# Altium PCB PCB1_BUS_DATN.PcbDoc
Units mil, origin at the board's own origin, x right, y up, seen from the top; angles counter-clockwise.
Board outline 2985 x 2850 mil, 2 copper layers (Top Layer, Bottom Layer); 14 components, 31 nets, 90 pads, 2 vias.
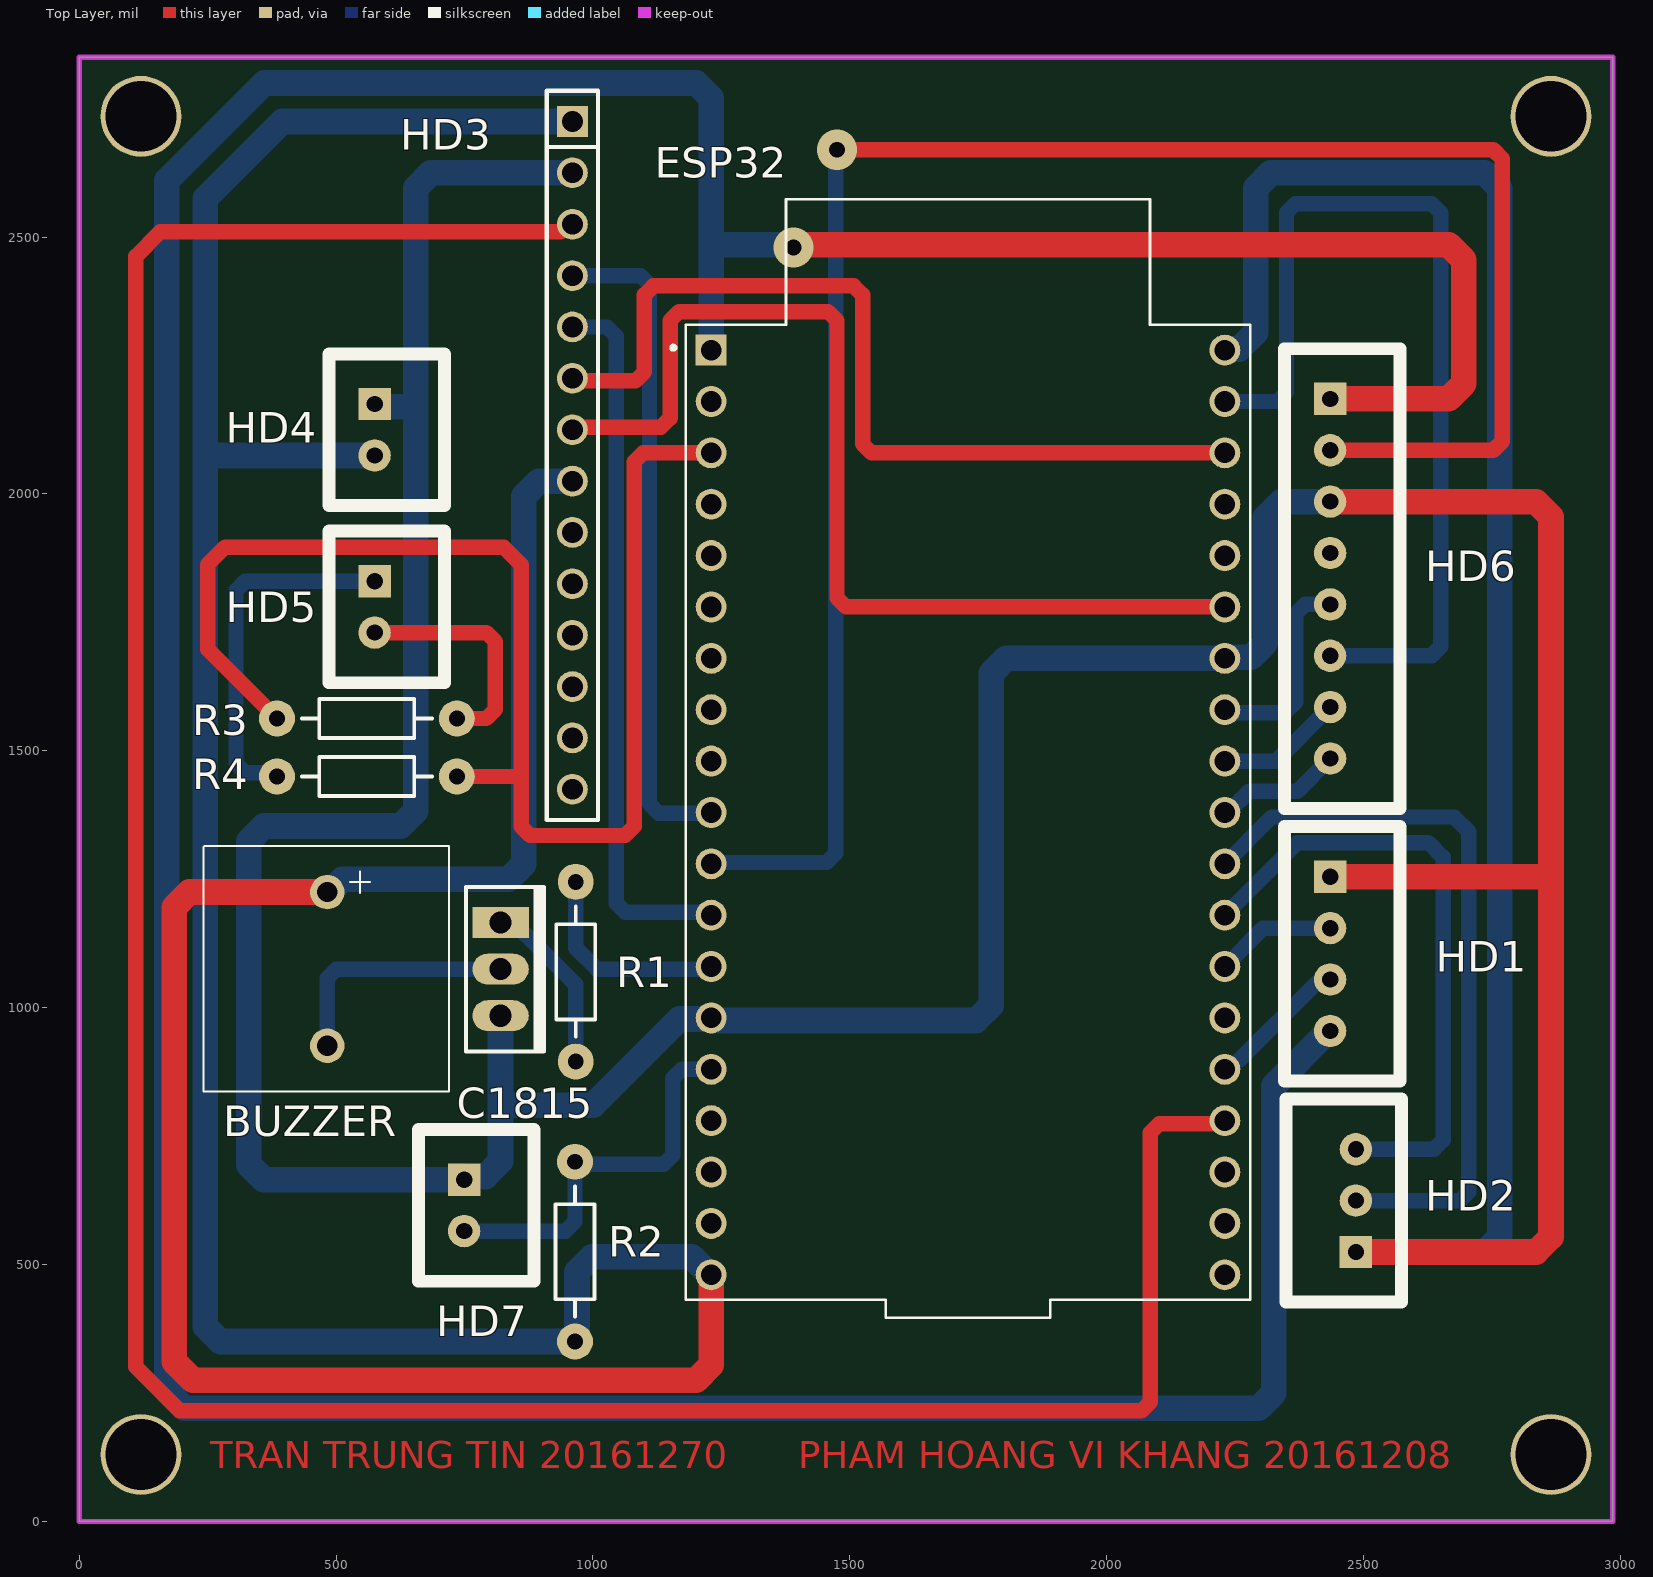
[diagram p0: Top Layer view]
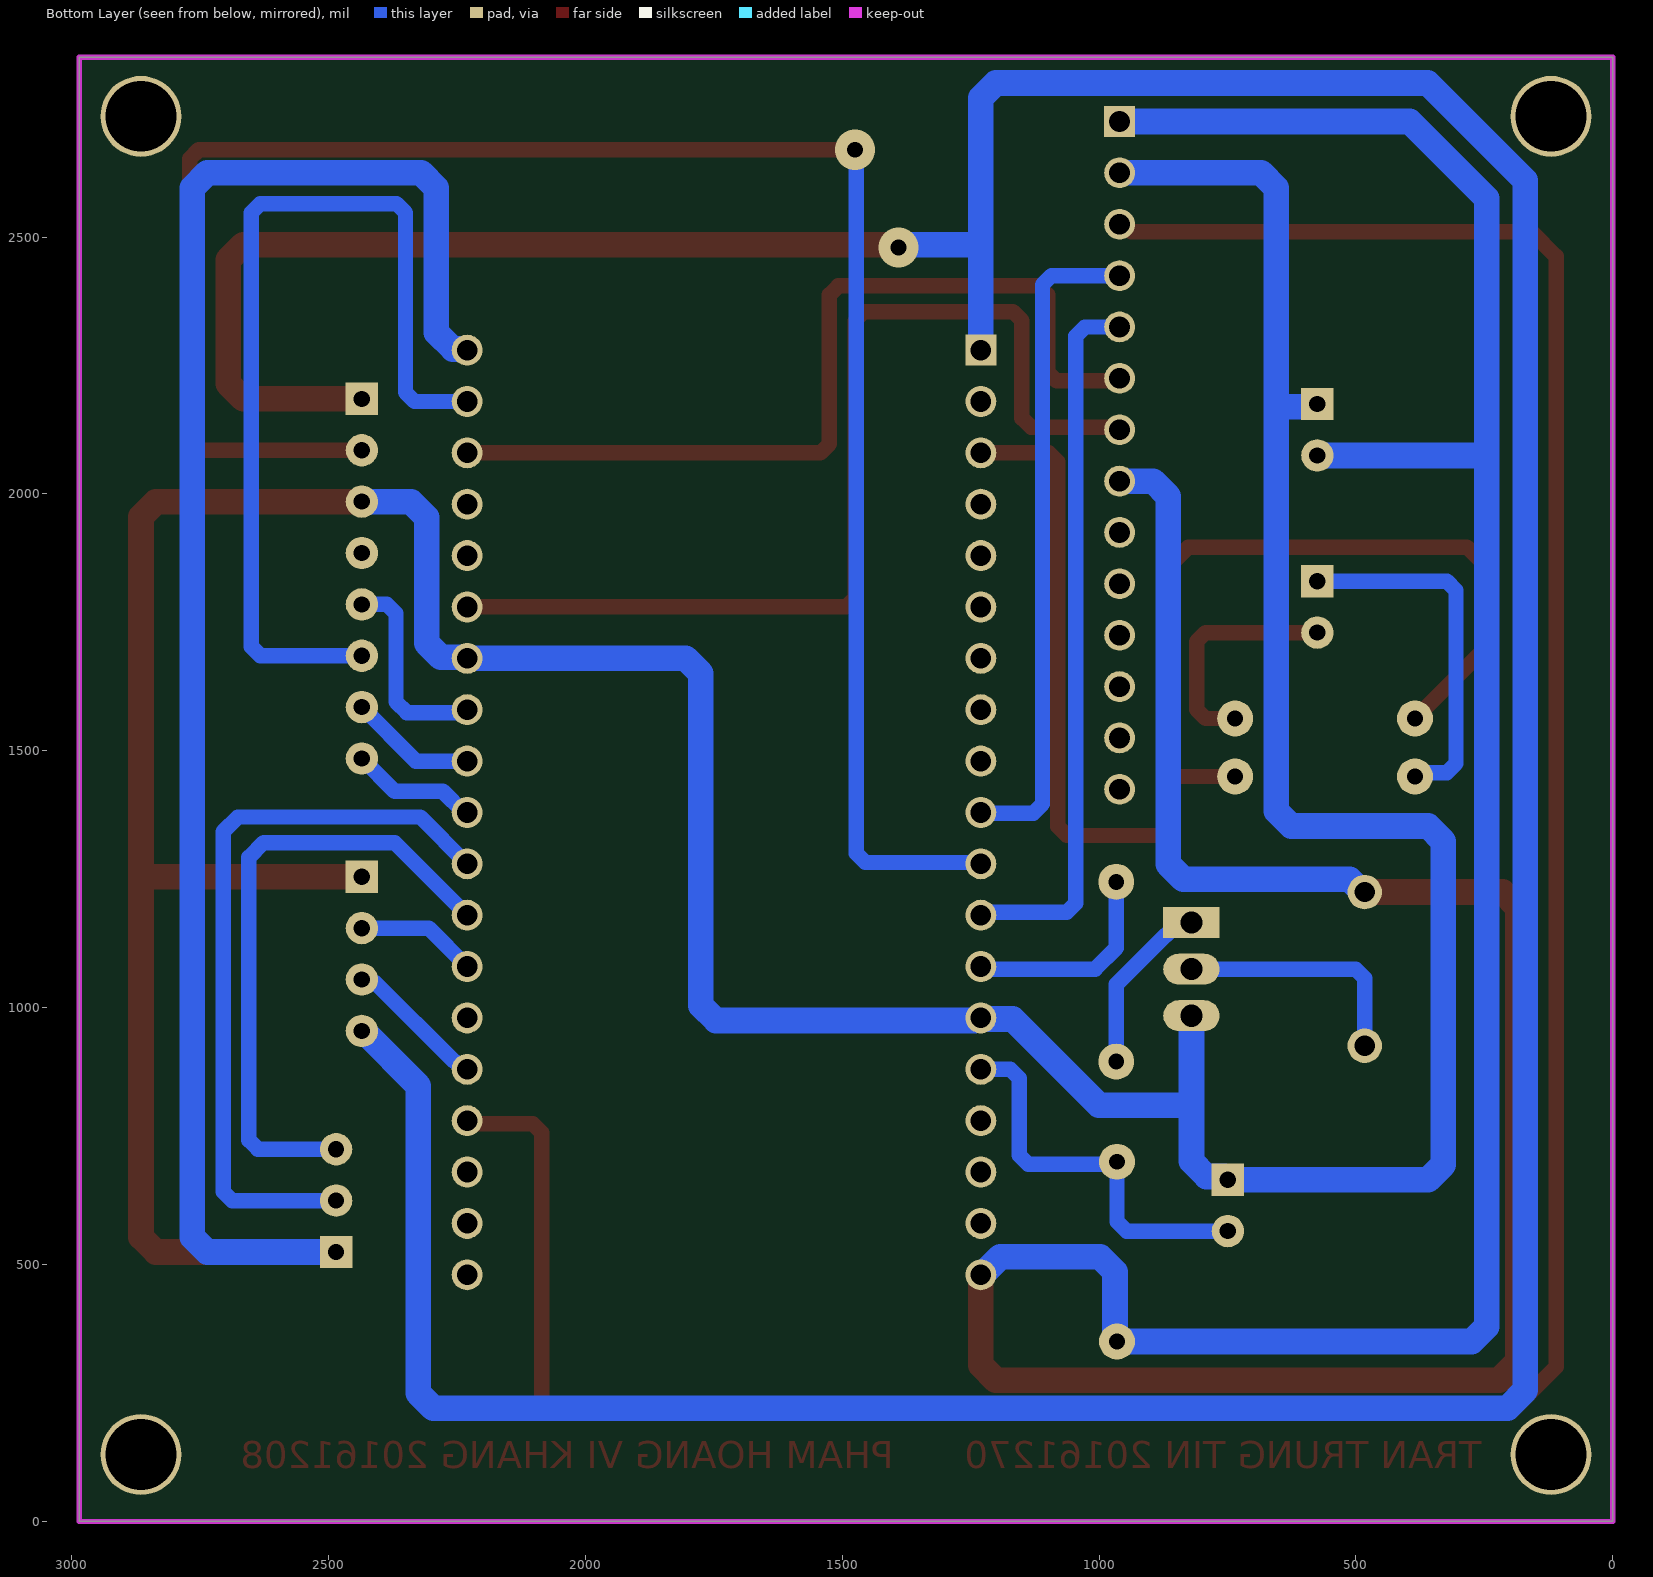
[diagram p1: Bottom Layer view, seen from below]
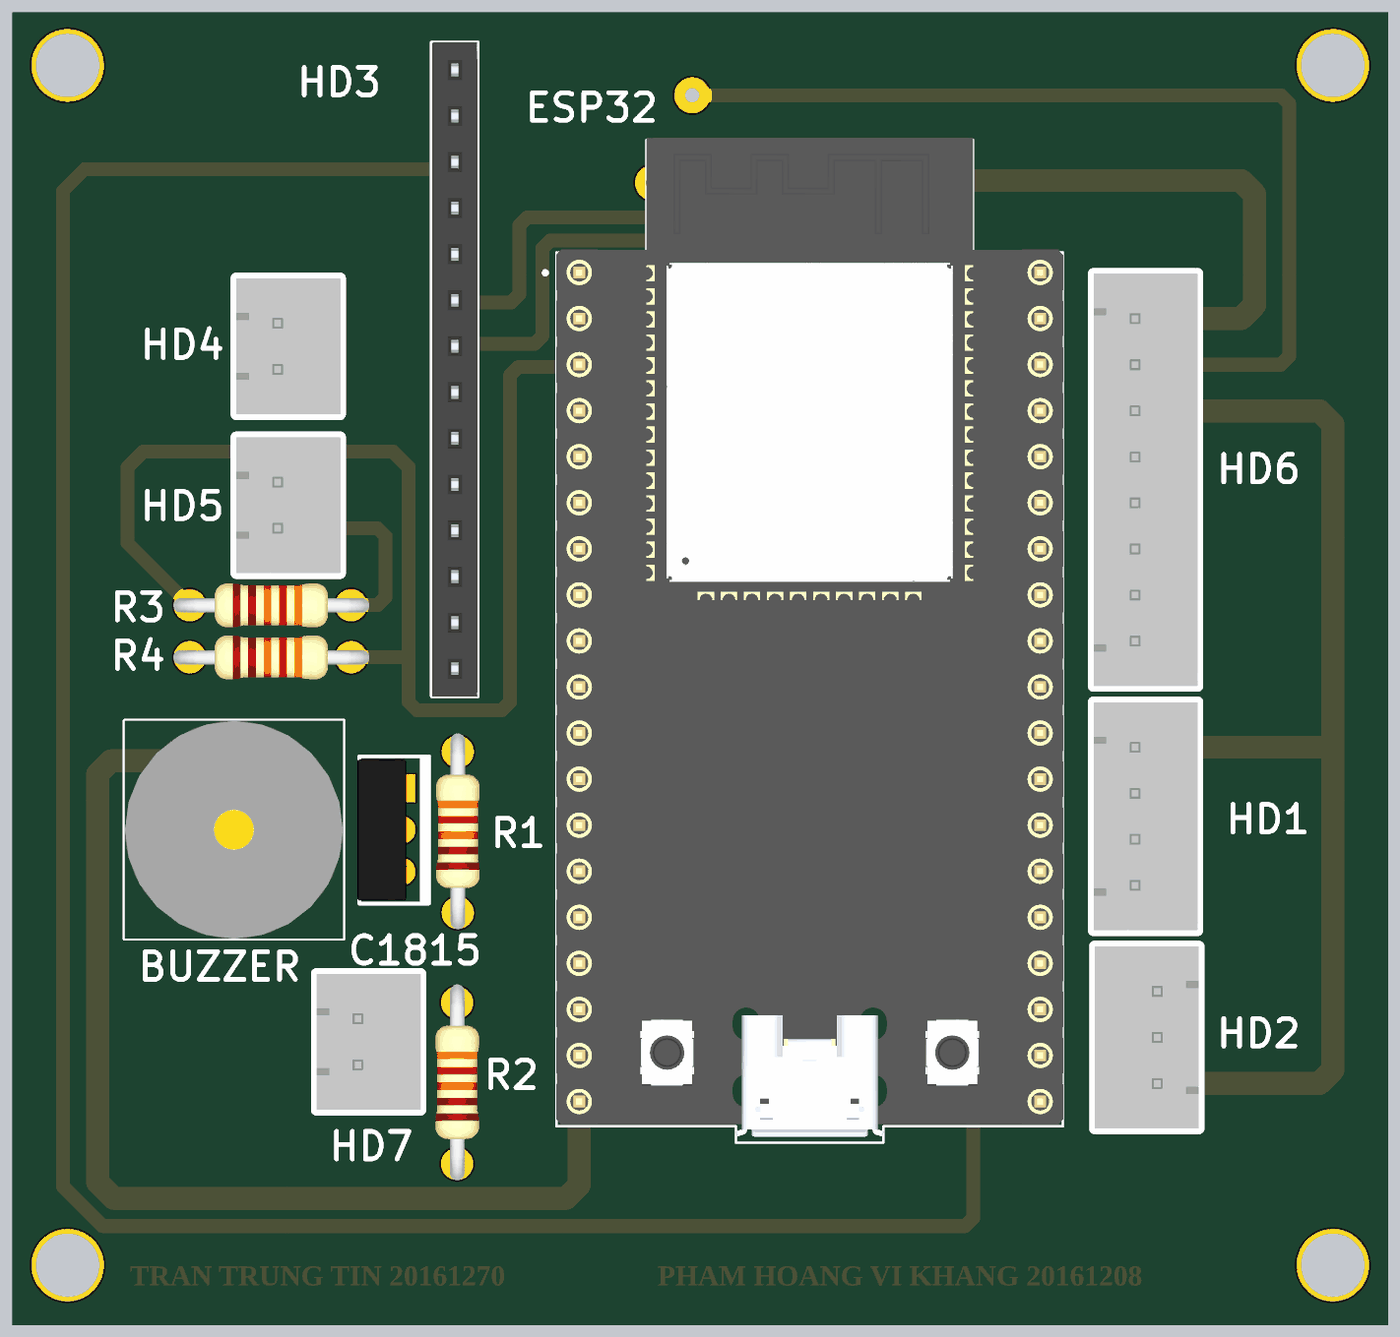
[diagram p2: 3D render of the assembled board from above, using the file's embedded part models]

## Layer stack, top to bottom
Top Solder: solder mask 0.4, Solder Resist, Dk 3.5
Top Layer: signal copper 1.4
Dielectric 1: dielectric 12.6, FR-4, Dk 4.8
Bottom Layer: signal copper 1.4
Bottom Solder: solder mask 0.4, Solder Resist, Dk 3.5

## Board outline
0,0 0,2850 2985,2850 2985,0

## Design rules (kind name [scope] priority, off if disabled: settings)
Clearance [All] p1: gap=20 ignorepadtopadclearanceinfootprint=FALSE
PolygonConnect [All] p1: connectstyle=Relief reliefconductorwidth=10 reliefentries=4 polygonreliefangle="90 Angle" airgapwidth=10
RoutingVias [All] p1: holewidth=31 width=78 viastyle="Through Hole" minholewidth=31 minwidth=78 maxholewidth=31 maxwidth=78
SolderMaskExpansion [All] p1: expansion=4 istentingtop=FALSE
Width [All] p1: maxlimit=50 minlimit=30 preferedwidth=40
30 further rules are at their usual default settings.

## Components (designator, comment, footprint, x,y, rotation, side; value= is the part's Value field where it differs from the comment)
BUZZER "Buzzer 5v" "Buzzer 5v" 482.79,1225 r270 top
C1815 "Transistor C1815" TO126 820,1075 r270 top value=C1815
ESP32 "ESP32-DEVKITC" MODULE_ESP32-DEVKITC 1730,1380.39 r0 top
HD1 "Header 4P 2.54 Duc Thang" XH2.54M-4 2435,1254.71 r270 top
HD2 "Header 3P 2.54 Duc Thang" XH2.54M-3 2485,524.43 r90 top
HD3 "JP14" JP14-C1T 960,2725 r270 top
HD4 "Header 2P 2.54 Duc Thang" XH2.54M-2 575,2175 r270 top
HD5 "Header 2P 2.54 Duc Thang" XH2.54M-2 575,1830 r270 top
HD6 "Header 8P 2.54 Duc Thang" XH2.54M-8 2435,2185 r270 top
HD7 "Header 2P 2.54 Duc Thang" XH2.54M-2 749.27,665 r270 top
R1 "24K" R1/4W 966.45,1245 r270 top value="R1/4W - 1K"
R2 "10K" R1/4W 965,700 r270 top value="R1/4W - 1K"
R3 "100K" R1/4W 735,1562.85 r180 top value="R1/4W - 1K"
R4 "100K" R1/4W 735,1450 r180 top value="R1/4W - 1K"

## Footprints (in the part's own frame and the unit in brackets; to place one, negate y for a bottom-side part, rotate by r counter-clockwise, add the part's x,y. Pads: shape width x height; smd on the part's side, far side on the other; paste and mask are expansions set on the pad)
"Buzzer 5v" [mm]
  round 1.7 hole 1 mask+0.05: 1(0,0) 2(7.6,0)
  silkscreen extent -2.27,-6.12 9.85,6.02, body extent -2.2,-6.05 9.8,5.95, height 9.5
JP14-C1T [mm] "14 row, straight, gold plating"
  rect 1.52x1.52 hole 1.02: 1(0,0)
  round 1.52 hole 1.02: 2(2.54,0) 3(5.08,0) 4(7.62,0) 5(10.16,0) 6(12.7,0) 7(15.24,0) 8(17.78,0) 9(20.32,0) 10(22.86,0) 11(25.4,0) 12(27.94,0) 13(30.48,0) 14(33.02,0)
  silkscreen extent -1.52,-1.27 34.54,1.27, body extent -1.52,-1.25 34.54,1.25, height 8.51
MODULE_ESP32-DEVKITC [mm]
  rect 1.53x1.53 hole 1.02: 1(-12.7,22.85)
  round 1.53 hole 1.02: 2(-12.7,20.31) 3(-12.7,17.77) 4(-12.7,15.23) 5(-12.7,12.69) 6(-12.7,10.15) 7(-12.7,7.61) 8(-12.7,5.07) 9(-12.7,2.53) 10(-12.7,-0.01) 11(-12.7,-2.55) 12(-12.7,-5.09) 13(-12.7,-7.63) 14(-12.7,-10.17) 15(-12.7,-12.71) 16(-12.7,-15.25) 17(-12.7,-17.79) 18(-12.7,-20.33) 19(-12.7,-22.87) 20(12.7,-22.87) 21(12.7,-20.33) 22(12.7,-17.79) 23(12.7,-15.25) 24(12.7,-12.71) 25(12.7,-10.17) 26(12.7,-7.63) 27(12.7,-5.09) 28(12.7,-2.55) 29(12.7,-0.01) 30(12.7,2.53) 31(12.7,5.07) 32(12.7,7.61) 33(12.7,10.15) 34(12.7,12.69) 35(12.7,15.23) 36(12.7,17.77) 37(12.7,20.31) 38(12.7,22.85)
  silkscreen extent -14.67,-25 13.95,30.3, body extent -13.97,-24.67 13.97,30.43, height 7.31
R1/4W [mil] "R 1/4W, 2 Pin, 350mil"
  round 70 hole 31: 1(0,0) 2(350,0)
  silkscreen extent 48,-38 302,38, body extent -40,-47 386,47, height 111
TO126 [mil] "TO, Thru-Hole, Vertical, Heatsink Mounted; 3 In-Line Leads; Pitch 2.54 mm; Pin sequence 1, 3, 2"
  rect 60x110 hole 43.31: 1(-90.55,0)
  oval 60x110 hole 43.31: 2(0,0) 3(90.55,0)
  silkscreen extent -160,-67 160,85, body extent -154,-71 154,35, height 614
XH2.54M-2 [mm]
  rect 1.6x1.6 hole 0.8: 1(0,0)
  round 1.6 hole 0.8: 2(2.54,0)
  silkscreen extent -2.48,-2.26 5.02,3.46, body extent -2.48,-2.26 5.02,3.48, height 6.91
XH2.54M-3 [mm]
  rect 1.6x1.6 hole 0.8: 1(0,0)
  round 1.6 hole 0.8: 2(2.54,0) 3(5.08,0)
  silkscreen extent -2.48,-2.26 7.56,3.46, body extent -2.48,-2.26 7.56,3.48, height 6.91
XH2.54M-4 [mm]
  rect 1.6x1.6 hole 0.8: 1(0,0)
  round 1.6 hole 0.8: 2(2.54,0) 3(5.08,0) 4(7.62,0)
  silkscreen extent -2.48,-2.26 10.1,3.46, body extent -2.48,-2.26 10.1,3.48, height 6.91
XH2.54M-8 [mm]
  rect 1.6x1.6 hole 0.8: 1(0,0)
  round 1.6 hole 0.8: 2(2.54,0) 3(5.08,0) 4(7.62,0) 5(10.16,0) 6(12.7,0) 7(15.24,0) 8(17.78,0)
  silkscreen extent -2.48,-2.26 20.26,3.46, body extent -2.48,-2.26 20.26,3.48, height 6.91

## Part data
C1815: library part C1815, "NPN 600mW, ECB"
ESP32: "- Transceiver; 802.11 b/g/n _Wi-Fi, WiFi, WLAN_, BluetoothÂ® Smart Ready 4.x Dual Mode For Use With ESP-WROOM-32", Package=None, Availability=Unavailable, MF="Espressif Systems", MP=ESP32-DEVKITC-32D-F, Price=None, SnapEDA_Link=https://www.snapeda.com/parts/ESP32-DEVKITC-32D-F/Espressif%20Systems/view-part/4220172/?ref=snap
HD1 HD2 HD4 HD5 HD6 HD7: "Cắm", Chung_Loai=Cắm, Don_Vi=Con
  HD1: Ma_Hang=MH001285, Ten_Linh_Kien="Header 4P XH2.54-4P Đực Thẳng"
  HD2: Ma_Hang=MH001292, Ten_Linh_Kien="Header 3P XH2.54-3P Đực Thẳng"
  HD4 HD5 HD7: Ma_Hang=MH001283, Ten_Linh_Kien="Header 2P XH2.54-2P Đực Thẳng"
  HD6: Ma_Hang=MH003366, Ten_Linh_Kien="Header 8P XH2.54-8P Đực Thẳng"
HD3: "WR-PHD 2.54 mm Angled Socket Header", Manufacturer="W¨¹rth Elektronik eiSos GmbH", partNo=613014143121, ComponentLink1 Description=Manufacturer, ComponentLink1URL=http://www.we-online.com, ComponentLink2 Description=Datasheet, ComponentLink2URL=http://katalog.we-online.de/em/datasheet/6130xx143121.pdf, Created by="Karrer Zheng", Created Date="29 March 2013", NoPins=14
R1 R2 R3 R4: library part R, "Resistor 1/4W"

## Free pads (board coordinates)
  round 157.48 hole 137.79: 25(120,2735) 26(120,130) 27(2865,130) 28(2865,2735)

## Via types
v1: diameter 78, hole 31, Top Layer to Bottom Layer, 2 vias

## Nets (pads, with @x,y where several pads share a name; then routed paths per layer and width w, separated by ;. In a path a pad name is that pad's centre, name@x,y a point inside that pad or via, vN(x,y) a via of type N, cw(c..) or ccw(c..) an arc to the next point about the centre after c; other vN are vias at no path point)
3V3_ESP32: ESP32.1 HD1.4 HD6.1 | length 8925.9
  Top Layer w50: v1(1390,2480) 1395,2485 2665.71,2485 2695,2455.71 2695,2214.29 2665.71,2185 HD6.1
  Bottom Layer w50: ESP32.1 1230,2485 ; v1(1390,2480) 1385,2485 1230,2485 ; HD1.4 2431.48,954.71 2325,848.23 2325,249.29 2295.71,220 204.99,220 170,254.99 170,2610 359.92,2799.92 1200.71,2799.92 1230,2770.63 1230,2485
5V_ESP32: BUZZER.1 ESP32.19 HD3.1 HD3.8 HD4.2 R2.2 | length 8130.9
  Top Layer w50: BUZZER.1 214.29,1225 185,1195.71 185,310.71 220.71,275 1200.71,275 1230,304.29 ESP32.19
  Bottom Layer w50: BUZZER.1 487.37,1225 512.37,1250 835.71,1250 865,1279.29 865,1995.71 894.29,2025 HD3.8 ; HD4.2 245,2075 ; HD3.1 395,2725 245,2575 245,2075 ; ESP32.19 1227.23,480 1192.23,515 998.12,515 968.83,485.71 968.83,353.83 R2.2 274.29,350 245,379.29 245,2075
CS_TFT: ESP32.23 HD3.3 | length 5742.3
  Top Layer w30: HD3.3 951.92,2525 936.92,2510 157.57,2510 110,2462.43 110,300.85 195.85,215 2067.43,215 2085,232.57 2085,756.64 2102.57,774.21 2224.21,774.21 ESP32.23
  Bottom Layer w30: ESP32.23@2224.21,774.21 ESP32.23
DATA_PIN: ESP32.3 R3.2 R4.1 | length 2731.1
  Top Layer w30: R3.2 250,1697.85 250,1862.43 284.07,1896.5 825.93,1896.5 860,1862.43 860,1450 ; R4.1 860,1450 ; ESP32.3 1097.57,2080 1080,2062.43 1080,1352.65 1062.43,1335.08 877.57,1335.08 860,1352.65 860,1450
  Bottom Layer w30: R4.1 R4.1@735.71,1450.71
GND_ESP32: C1815.3 ESP32.14 ESP32.32 ESP32.38 HD1.1 HD2.1 HD3.2 HD4.1 HD6.3 HD7.1 | length 11875.3
  Top Layer w50: HD1.1 2865,1254.71 ; HD6.3 2835.71,1985 2865,1955.71 2865,1254.71 ; HD2.1 2835.71,524.43 2865,553.72 2865,1254.71
  Bottom Layer w50: HD4.1 580,2170 655,2170 ; C1815.3 820,810 ; HD3.2 684.29,2625 655,2595.71 655,2170 ; ESP32.38 2231.96,2281.96 2257.55,2281.96 2290,2314.41 2290,2595.71 2319.29,2625 2735.71,2625 2765,2595.71 2765,553.72 2735.71,524.43 HD2.1 ; HD1.1 HD1.1@2435.14,1254.86 ; HD6.3 2339.29,1985 2308.5,1954.21 2308.5,1709.29 2281.17,1681.96 2231.96,1681.96 ESP32.32 1804.29,1680 1775,1650.71 1775,1004.29 1745.71,975 1242.24,975 1239.2,978.04 1231.96,978.04 ESP32.14 1228.04,978.04 1168.19,978.04 1000.15,810 820,810 ; 655,2170 655,1382.75 625.71,1353.46 359.29,1353.46 330,1324.18 330,694.29 359.29,665 HD7.1 755.77,671.5 790.71,671.5 820,700.79 820,810
IRQ_RC522: HD6.4
MISO_RC522: ESP32.31 HD6.5 | length 395.5
  Bottom Layer w30: ESP32.31 2235.79,1574.21 2347.43,1574.21 2368.5,1595.29 2368.5,1767.43 2386.08,1785 HD6.5
MOSI_RC522: ESP32.37 HD6.6 | length 1858.8
  Bottom Layer w30: ESP32.37 2332.43,2180 2350,2197.57 2350,2547.43 2367.57,2565 2632.43,2565 2650,2547.43 2650,1702.57 2632.43,1685 HD6.6
MOSI_TFT: ESP32.36 HD3.6 | length 1740.9
  Top Layer w30: HD3.6 965,2220 1082.43,2220 1100,2237.57 1100,2387.43 1117.57,2405 1507.43,2405 1525,2387.43 1525,2097.57 1542.57,2080 ESP32.36
NetBUZZER_2: BUZZER.2 C1815.2 | length 483.2
  Bottom Layer w30: BUZZER.2 482.79,1057.43 500.36,1075 C1815.2 C1815.2@825,1070
NetC1815_1: C1815.1 R1.2 | length 367.3
  Top Layer w30: C1815.1 C1815.1@834.6,1150.96
  Bottom Layer w30: C1815.1 845,1165.55 870.55,1140 871.92,1140 966.45,1045.47 R1.2
NetHD5_1: HD5.1 R4.2 | length 704.9
  Bottom Layer w30: R4.2 377.35,1457.65 322.57,1457.65 305,1475.23 305,1812.43 322.57,1830 HD5.1
NetHD5_2: HD5.2 R3.1 | length 456.6
  Top Layer w30: HD5.2 792.43,1730 810,1712.43 810,1580.43 792.43,1562.85 R3.1
PIN_BUTTON_SOS: ESP32.15 HD7.2 R2.1 | length 780.3
  Bottom Layer w30: HD7.2@755.58,571.31 HD7.2 946.56,565 965,583.44 R2.1 970,695 1137.43,695 1155,712.57 1155,862.43 1172.57,880 ESP32.15
PIN_BUZZER: ESP32.13 R1.1 | length 411.5
  Bottom Layer w30: R1.1 966.45,1116.19 1007.63,1075 1225,1075 ESP32.13
RS_TFT: ESP32.12 HD3.5 | length 1398.1
  Top Layer w30: ESP32.12@1225,1175 ESP32.12
  Bottom Layer w30: HD3.5 1027.43,2325 1045,2307.43 1045,1203.36 1062.57,1185.79 1224.21,1185.79 ESP32.12
RST_ESP32: ESP32.11 HD6.2 | length 3816.2
  Top Layer w30: v1(1475,2670) 2752.43,2670 2770,2652.43 2770,2102.57 2752.43,2085 HD6.2
  Bottom Layer w30: ESP32.11 1232.5,1282.5 1454.93,1282.5 1472.5,1300.07 1472.5,2667.5 v1(1475,2670)
RST_TFT: ESP32.10 HD3.4 | length 1291.1
  Bottom Layer w30: HD3.4@965,2425 1092.43,2425 1110,2407.43 1110,1396.38 1127.57,1378.81 1228.81,1378.81 ESP32.10
RX_GPS_NEO_6M: ESP32.26 HD1.2 | length 235.9
  Bottom Layer w30: ESP32.26 2304.71,1154.71 HD1.2
RX_SIM800A: ESP32.28 HD2.2 | length 1452.4
  Bottom Layer w30: ESP32.28 2321.21,1371.21 2676.22,1371.21 2705,1342.43 2705,642 2687.43,624.43 HD2.2
SCK_RC522: ESP32.30 HD6.7 | length 248.5
  Bottom Layer w30: ESP32.30 2330,1480 HD6.7
SCK_TFT: ESP32.33 HD3.7 | length 2030.9
  Top Layer w30: HD3.7 965,2130 1132.43,2130 1150,2147.57 1150,2337.43 1167.57,2355 1457.43,2355 1475,2337.43 1475,1797.57 1492.57,1780 ESP32.33
SDA_RC522: ESP32.29 HD6.8 | length 248.5
  Bottom Layer w30: ESP32.29 2236.23,1380 2277.44,1421.21 2371.21,1421.21 HD6.8
SDO_TFT: HD3.9
T_CLK_TFT: HD3.10
T_CS_TFT: HD3.11
T_DIN_TFT: HD3.12
T_DO_TFT: HD3.13
T_IRQ_TFT: HD3.14
TX_GPS_NEO_6M: ESP32.24 HD1.3 | length 277.4
  Bottom Layer w30: ESP32.24 2238.18,880 2253.3,895.12 2255.12,895.12 2408.4,1048.4 2428.69,1048.4 HD1.3
TX_SIM800A: ESP32.27 HD2.3 | length 1223.1
  Bottom Layer w30: ESP32.27 2371.21,1321.21 2626.22,1321.21 2655,1292.43 2655,742 2637.43,724.43 HD2.3
pads on no net: ESP32.2 ESP32.4 ESP32.5 ESP32.6 ESP32.7 ESP32.8 ESP32.9 ESP32.16 ESP32.17 ESP32.18 ESP32.20 ESP32.21 ESP32.22 ESP32.25 ESP32.34 ESP32.35

## Keep-outs
Keep-Out Layer:
  the board outline again, w10

## Other copper
Top Layer:
  text "TRAN TRUNG TIN 20161270" at 255,86.25 h90
  text "PHAM HOANG VI KHANG 20161208" at 1400,86.25 h90